# Altium PCB STM32四轴.PcbDoc (part 1 of 2)
Units mil, origin at the board's own origin, x right, y up, seen from the top; angles counter-clockwise.
Board outline 3937.01 x 3937.01 mil, 2 copper layers (Top Layer, Bottom Layer); 118 components, 144 nets, 597 pads, 182 vias.
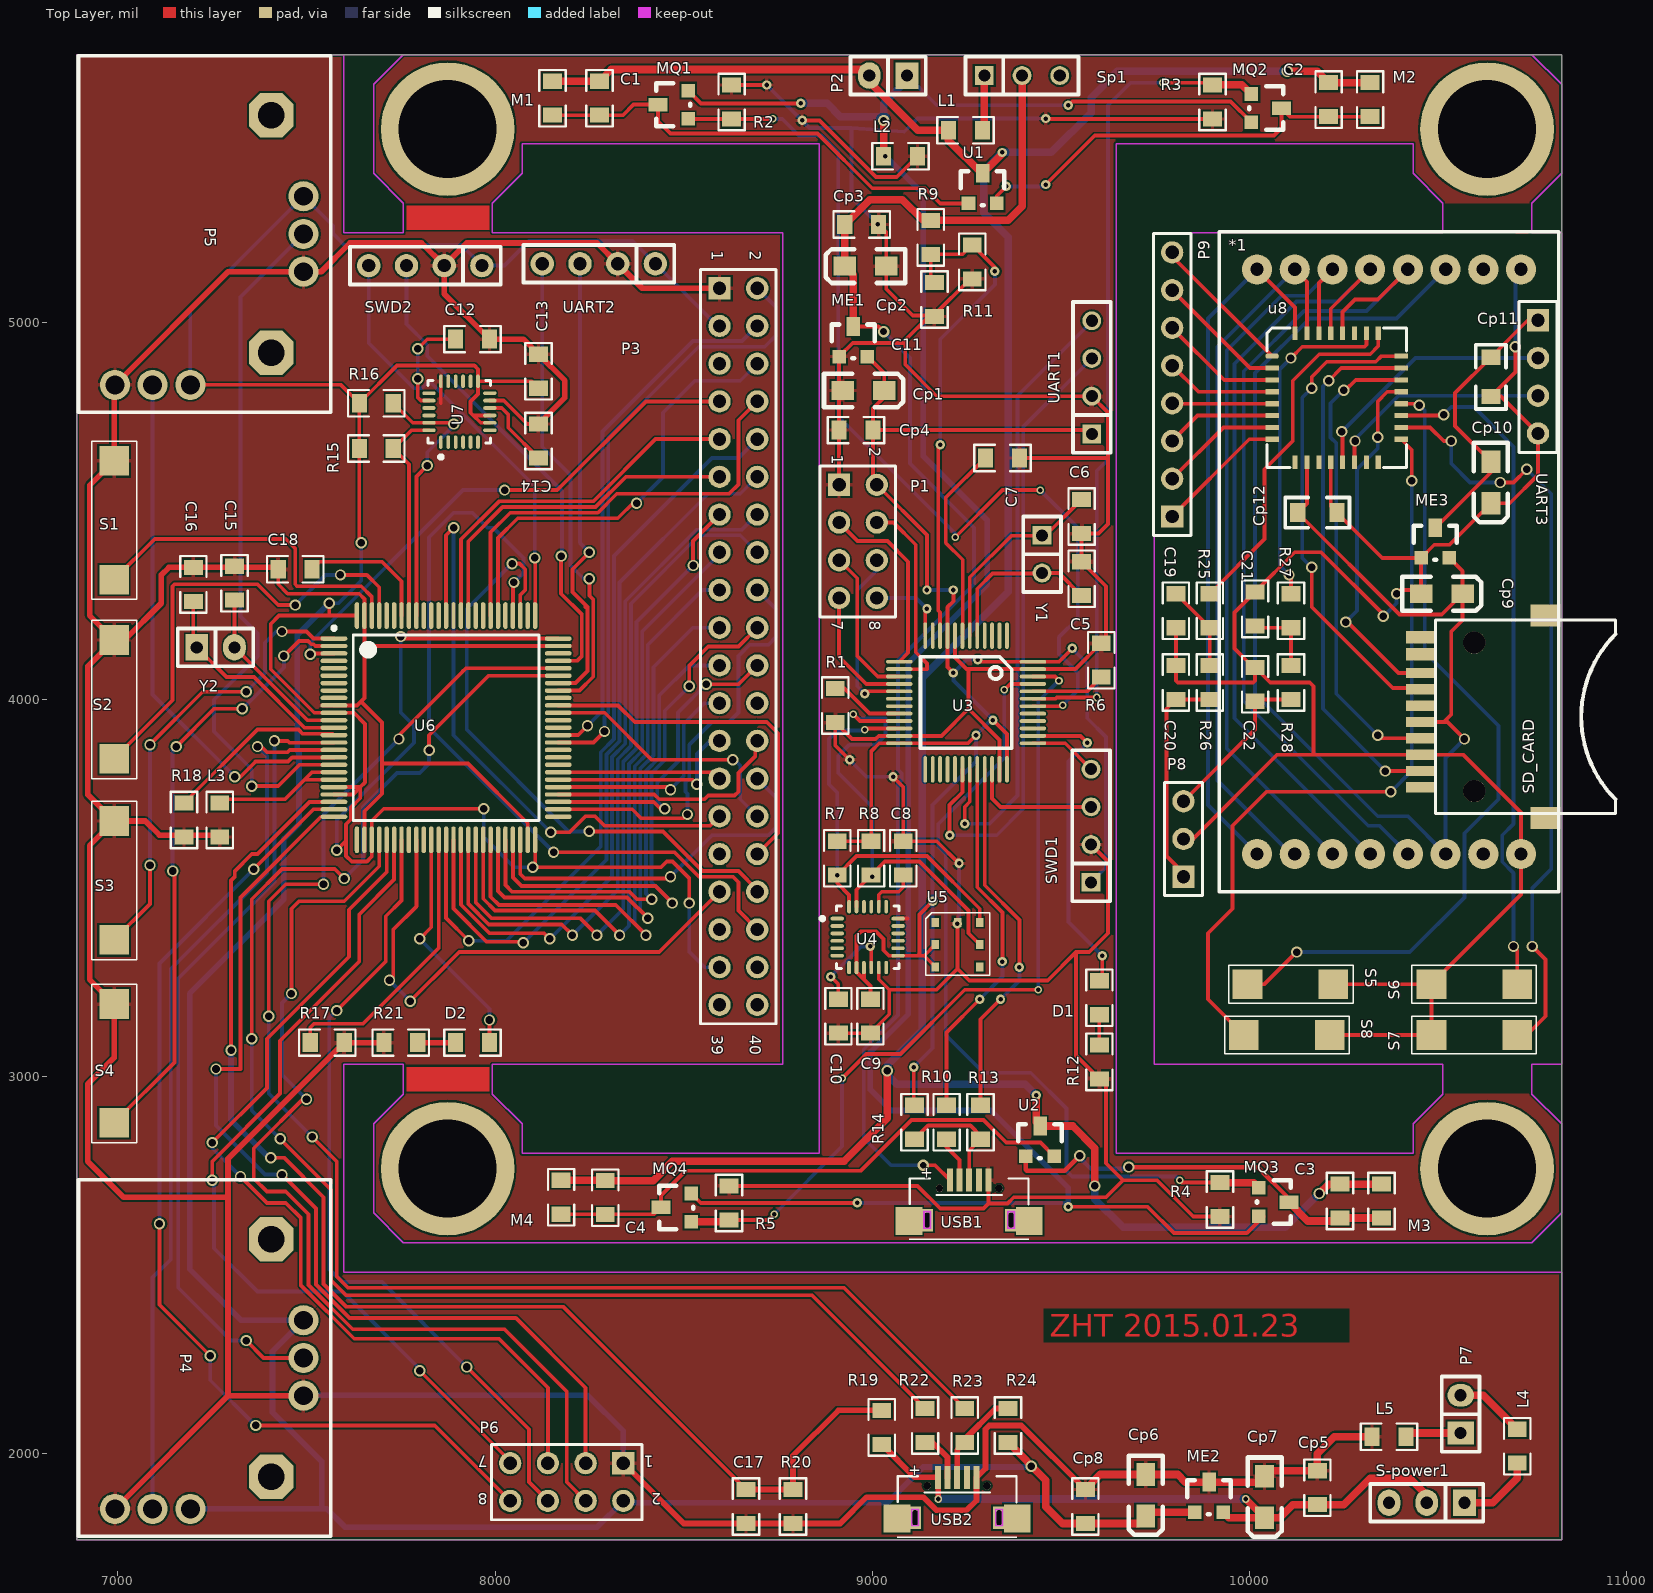
[diagram p0: Top Layer view]
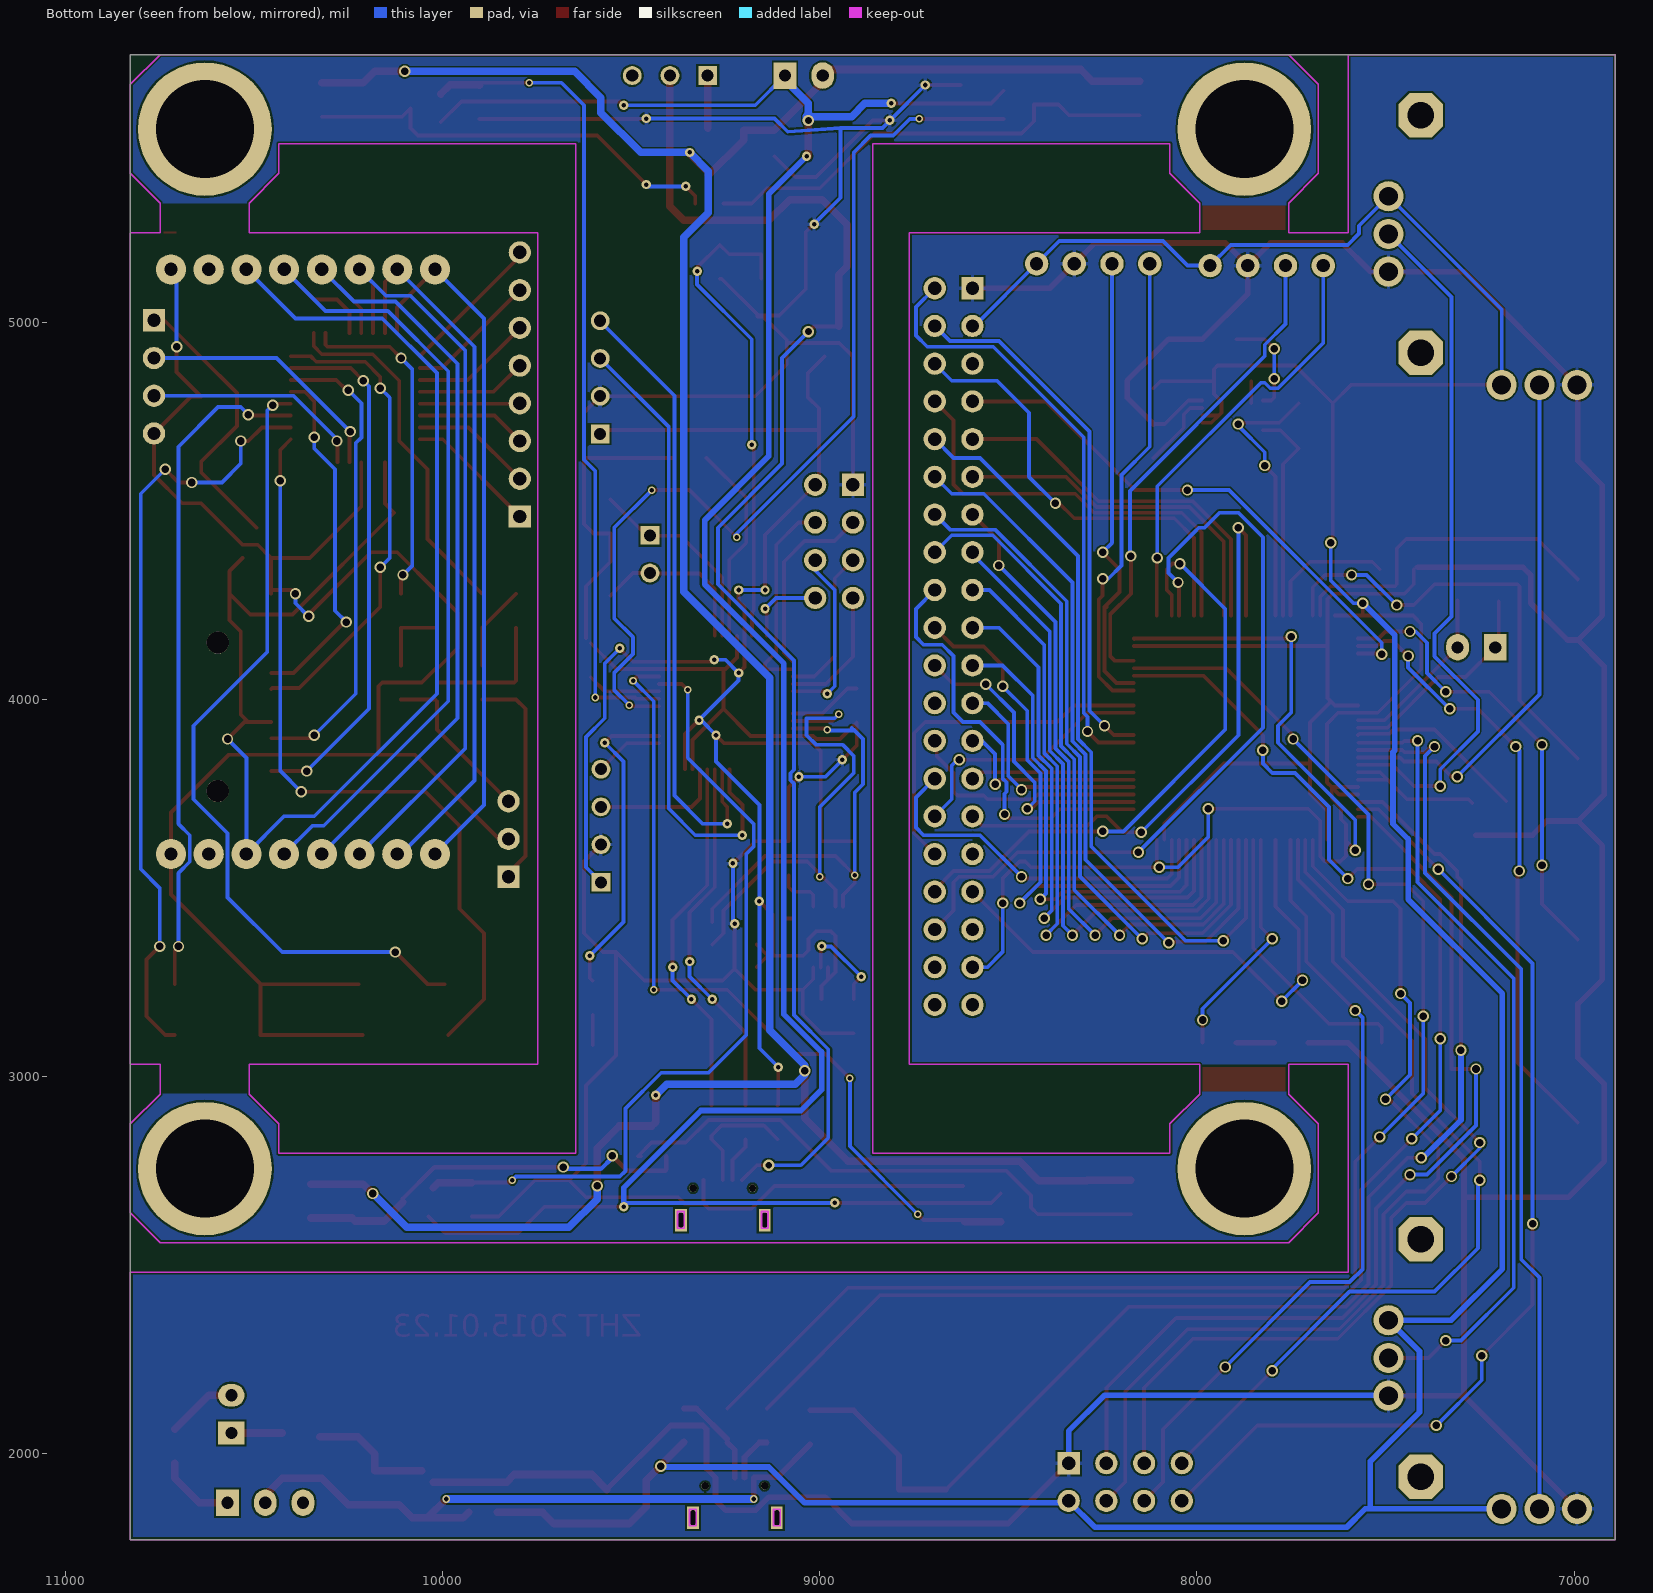
[diagram p1: Bottom Layer view, seen from below]

## Layer stack, top to bottom
Top Layer: signal copper 1.4
Dielectric: dielectric 12.6, FR-4, Dk 4.8
Bottom Layer: signal copper 1.4

## Board outline
6890.5,5709.42 6890.5,1772.41 10827.51,1772.41 10827.51,5709.42 6890.5,5709.42

## Design rules (kind name [scope] priority, off if disabled: settings)
Clearance [All] p1: gap=5
ComponentClearance [All] p1: gap=0 collisioncheckmode=3 verticalgap=0 showdistances=FALSE
DiffPairsRouting [All] p1: maxlimit=10 minlimit=5 mostfreqgap=10 maxuncoupledlength=500
HoleToHoleClearance [All] p1: gap=5 allowstackedmicrovias=TRUE
MinimumSolderMaskSliver [All] p1: minsoldermaskwidth=5
PolygonConnect [All] p1: connectstyle=Relief reliefconductorwidth=10 reliefentries=4 polygonreliefangle="90 Angle"
RoutingVias [All] p1: holewidth=12 width=25 viastyle="Through Hole" minholewidth=10 minwidth=20 maxholewidth=100 maxwidth=200
SilkToSilkClearance [All] p1: silktosilkclearance=5
SilkscreenOverComponentPads [All] p1: minsilkscreentomaskgap=5
SolderMaskExpansion [All] p1: expansion=4
Width [All] p1: maxlimit=50 minlimit=5 preferedwidth=5
22 further rules are at their usual default settings.

## Classes and differential pairs
component class STC51: *1 C19 C20 C21 C22 Cp9 Cp10 Cp11 Cp12 ME3 P8 P9 R25 R26 R27 R28 S5 S6 S7 S8 SD_CARD u8 UART3
component class STM32四轴: C1 C2 C3 C4 C5 C6 C7 C8 C9 C10 C11 Cp1 Cp2 Cp3 Cp4 D1 L1 L2 M1 M2 M3 M4 ME1 MQ1 MQ2 MQ3 MQ4 P1 P2 R1 R2 R3 R4 R5 R6 R7 R8 R9 R10 R11 R12 R13 R14 Sp1 SWD1 U1 U2 U3 U4 U5 UART1 USB1 Y1
component class STM32遥控: C12 C13 C14 C15 C16 C17 C18 Cp5 Cp6 Cp7 Cp8 D2 L3 L4 L5 ME2 P3 P4 P5 P6 P7 R15 R16 R17 R18 R19 R20 R21 R22 R23 R24 S1 S2 S3 S4 S-power1 SWD2 U6 U7 UART2 USB2 Y2

## Components (designator, comment, footprint, x,y, rotation, side; value= is the part's Value field where it differs from the comment)
*1 "5110" 5110 9920,5140 r0 top
C1 "Cap" 0805s 8277,5638.91 r270 top
C2 "Cap" 0805s 10210,5635 r270 top
C3 "Cap" 0805s 10240,2715 r270 top
C4 "Cap" 0805s 8292,2723.91 r270 top
C5 "Cap" 0805s 9555,4365 r270 top
C6 "Cap" 0805s 9555,4440 r90 top
C7 "Cap" 0805s 9390,4640 r180 top
C8 "Cap" 0805s 9082,3533.91 r90 top
C9 "Cap" 0805s 8995,3115 r90 top
C10 "Cap" 0805s 8910,3115 r90 top
C11 "Cap" 0805s 9165,5015 r90 top
C12 "Cap" 0805s 7895,4955 r0 top
C13 "Cap" 0805s 8115,4915 r270 top
C14 "Cap" 0805s 8115,4730 r270 top
C15 "Cap" 0805s 7308.91,4353 r270 top
C16 "Cap" 0805s 7200,4350 r270 top
C17 "Cap" 0805s 8665,1815 r90 top
C18 "Cap" 0805s 7425,4345 r0 top
C19 "Cap" 0805s 9805,4190 r90 top
C20 "Cap" 0805s 9805,4090 r270 top
C21 "Cap" 0805s 10015,4285 r270 top
C22 "Cap" 0805s 10015,4085 r270 top
Cp1 "Cap Pol1" 3216#1 9032,4818.91 r0 top
Cp2 "Cap Pol1" 3216#1 8927,5148.91 r180 top
Cp3 "Cap" 0805s 9017,5258.91 r180 top
Cp4 "Cap" 0805s 8912,4713.91 r0 top
Cp5 "Cap" 0805s 10180,1955 r270 top
Cp6 "Cap Pol1" 3216#2 9725,1945 r270 top
Cp7 "Cap Pol1" 3216#2 10040,1940 r270 top
Cp8 "Cap" 0805s 9565,1905 r270 top
Cp9 "Cap Pol1" 3216#2 10455,4280 r0 top
Cp10 "Cap Pol1" 3216#2 10640,4630 r270 top
Cp11 "Cap" 0805 10640,4810 r90 top
Cp12 "Cap" 0805 10225,4495 r180 top
D1 "LED0" 0805s 9602,3253.91 r270 top
D2 "LED0" 0805s 7985,3090 r180 top
L1 "Inductor" 0805s 9202,5508.91 r0 top
L2 "Inductor" 0805s 9030,5440 r0 top
L3 "Inductor" 0805s 7270,3635 r90 top
L4 "Inductor" 0805s 10710,2065 r270 top
L5 "Inductor" 0805s 10415,2045 r180 top
M1 "Header 2" 0805s 8152,5548.91 r90 top
M2 "Header 2" 0805s 10320,5635 r270 top
M3 "Header 2" 0805s 10350,2625 r90 top
M4 "Header 2" 0805s 8175,2725 r270 top
ME1 "Volt Reg" SOT-23#1 8912,4908.91 r0 top
ME2 "Volt Reg" SOT-23#2 9895,1925 r0 top
ME3 "Volt Reg" SOT-23#1 10455,4375 r0 top
MQ1 "NMOS-2" SOT-23#1 8512,5538.91 r90 top
MQ2 "NMOS-2" SOT-23#1 10005,5605 r270 top
MQ3 "NMOS-2" SOT-23#1 10025,2705 r270 top
MQ4 "NMOS-2" SOT-23#1 8520,2615 r90 top
P1 "NRF24L01" HDR2X4 8912,4568.91 r270 top
P2 "Header 2" SIP2#1 9042,5653.91 r180 top
P3 "Header 20X2" HDR2X20 8595,5090 r270 top
P4 "Header 5" yaogan 7092,2253.91 r270 top
P5 "Header 5" yaogan 7092,5233.91 r270 top
P6 "NRF24L01" HDR2X4 8340,1975 r180 top
P7 "Header 2" SIP2#1 10560,2105 r90 top
P8 "Header 3" HDR1X3 9825,3530 r90 top
P9 "Header 8" HDR1X8 9795,4485 r90 top
R1 "Res2" 0805s 8902,4028.91 r270 top
R2 "Res2" 0805s 8627,5538.91 r90 top
R3 "Res2" 0805s 9902,5628.91 r270 top
R4 "Res2" 0805s 9922,2718.91 r270 top
R5 "Res2" 0805s 8620,2620 r90 top
R6 "Res2" 0805s 9607,4058.91 r90 top
R7 "Res2" 0805s 8907,3533.91 r90 top
R8 "Res2" 0805s 8997,3533.91 r90 top
R9 "Res2" 0805s 9155,5180 r90 top
R10 "Res_0603" 0805s 9197,2833.91 r90 top
R11 "Res2" 0805s 9265,5115 r90 top
R12 "Res2" 0805s 9602,2993.91 r90 top
R13 "Res_0603" 0805s 9287,2833.91 r90 top
R14 "Res_0603" 0805s 9112,2833.91 r90 top
R15 "Res2" 0805s 7730,4665 r180 top
R16 "Res2" 0805s 7730,4785 r180 top
R17 "Res2" 0805s 7510,3090 r0 top
R18 "Res2" 0805s 7175,3725 r270 top
R19 "Res2" 0805s 9025,2115 r270 top
R20 "Res2" 0805s 8790,1815 r90 top
R21 "Res2" 0805s 7705,3090 r0 top
R22 "Res_0603" 0805s 9140,2030 r90 top
R23 "Res_0603" 0805s 9245,2030 r90 top
R24 "Res_0603" 0805s 9360,2120 r270 top
R25 "Res2" 0805s 9895,4190 r90 top
R26 "Res2" 0805s 9895,4000 r90 top
R27 "Res2" 0805s 10110,4190 r90 top
R28 "Res2" 0805s 10110,4000 r90 top
S1 "SW-PB" 按键#1 6990,4475 r90 top
S2 "SW-PB" 按键#1 6990,4000 r90 top
S3 "SW-PB" 按键#1 6990,3520 r90 top
S4 "SW-PB" 按键#1 6990,3035 r90 top
S5 "SW-PB" 按键#2 10065,3245 r0 top
S6 "SW-PB" 按键#2 10640,3245 r180 top
S7 "SW-PB" 按键#2 10640,3110 r180 top
S8 "SW-PB" 按键#2 10055,3110 r0 top
S-power1 "SW-SPST" SIP3#1 10470,1870 r180 top
SD_CARD "sd card" SD卡 10785,3960 r0 top
Sp1 "SW-SPST" SIP3#2 9297,5653.91 r0 top
SWD1 "HDR1X4_180_2.54" SIP4#1 9580,3515 r90 top
SWD2 "HDR1X4_180_2.54" SIP4#2 7965,5150 r180 top
U1 "bat54c" SOT-23#2 9295,5395 r0 top
U2 "bat54c" SOT-23#2 9447,2868.91 r0 top
U3 "STM32F103C8T6" LQFP48 9357,4168.91 r270 top
U4 "mpu6050" MPU6050 8907,3418.91 r0 top
U5 "bmp180" LCC8 9167,3408.91 r0 top
U6 "STM32F103VET6" LQFP100_N 7870,3925 r0 top
U7 "mpu6050" MPU6050 7856.09,4682 r90 top
u8 "STC15L2K60S2" LQFP-32 10060,4910 r0 top
UART1 "HDR1X4_180_2.54" SIP4#1 9582,4703.91 r90 top
UART2 "HDR1X4_180_2.54" SIP4#2 8425,5155 r180 top
UART3 "Header 4" HDR1X4 10765,5005 r270 top
USB1 "USB_Micro" MICRO-USB 9257,2638.91 r0 top
USB2 "USB_Micro" MICRO-USB 9225,1850 r0 top
Y1 "CRYSTAL" SIP2#2 9450,4435 r270 top
Y2 "CRYSTAL" SIP2#1 7258.91,4138 r0 top

## Footprints (in the part's own frame and the unit in brackets; to place one, negate y for a bottom-side part, rotate by r counter-clockwise, add the part's x,y. Pads: shape width x height; smd on the part's side, far side on the other; paste and mask are expansions set on the pad)
0805 [mil]
  rect 40x50 smd: 1(-7,0) 2(97,0)
  silkscreen extent -40,-40 130,40
0805s [mil]
  rect 40x50 smd: 1(0,0) 2(90,0)
  silkscreen extent -30,-35 120,35
3216#1 [mil]
  rect 60x50 smd: 1(0,0) 2(-110,0)
  silkscreen extent -160,-45 50,45
3216#2 [mil]
  rect 60x50 smd: 1(110,0) 2(0,0)
  silkscreen extent -50,-45 160,45
5110 [mil]
  round 80 hole 35.43: 1(100,-1550) 1(100,0) 2(200,-1550) 2(200,0) 3(300,-1550) 3(300,0) 4(400,-1550) 4(400,0) 5(500,-1550) 5(500,0) 6(600,-1550) 6(600,0) 7(700,-1550) 7(700,0) 8(800,-1550) 8(800,0)
  silkscreen extent 0,-1650 900,100
HDR1X3 [mm] "Connector; Header; 3 Position"
  rect 1.5x1.5 hole 0.9: 1(0,0)
  round 1.5 hole 0.9: 2(2.54,0) 3(5.08,0)
  silkscreen extent -1.27,-1.27 6.35,1.27
HDR1X4 [mm] "Connector; Header; 4 Position"
  rect 1.5x1.5 hole 0.9: 1(0,0)
  round 1.5 hole 0.9: 2(2.54,0) 3(5.08,0) 4(7.62,0)
  silkscreen extent -1.27,-1.27 8.89,1.27
HDR1X8 [mm] "Connector; Header; 8 Position"
  rect 1.5x1.5 hole 0.9: 1(0,0)
  round 1.5 hole 0.9: 2(2.54,0) 3(5.08,0) 4(7.62,0) 5(10.16,0) 6(12.7,0) 7(15.24,0) 8(17.78,0)
  silkscreen extent -1.27,-1.27 19.05,1.27
HDR2X4 [mm] "Connector; Header; 4x2 Position"
  rect 1.5x1.5 hole 0.9: 1(0,0)
  round 1.5 hole 0.9: 2(0,2.54) 3(2.54,0) 4(2.54,2.54) 5(5.08,0) 6(5.08,2.54) 7(7.62,0) 8(7.62,2.54)
  silkscreen extent -1.27,-1.27 8.89,3.81
HDR2X20 [mm] "Connector; Header; 20x2 Position"
  rect 1.5x1.5 hole 0.9: 1(0,0)
  round 1.5 hole 0.9: 2(0,2.54) 3(2.54,0) 4(2.54,2.54) 5(5.08,0) 6(5.08,2.54) 7(7.62,0) 8(7.62,2.54) 9(10.16,0) 10(10.16,2.54) 11(12.7,0) 12(12.7,2.54) 13(15.24,0) 14(15.24,2.54) 15(17.78,0) 16(17.78,2.54) 17(20.32,0) 18(20.32,2.54) 19(22.86,0) 20(22.86,2.54) 21(25.4,0) 22(25.4,2.54) 23(27.94,0) 24(27.94,2.54) 25(30.48,0) 26(30.48,2.54) 27(33.02,0) 28(33.02,2.54) 29(35.56,0) 30(35.56,2.54) 31(38.1,0) 32(38.1,2.54) 33(40.64,0) 34(40.64,2.54) 35(43.18,0) 36(43.18,2.54) 37(45.72,0) 38(45.72,2.54) 39(48.26,0) 40(48.26,2.54)
  silkscreen extent -1.27,-1.27 49.53,3.81
LCC8 [mm]
  rect 0.5x0.6 smd: 1(0,0) 2(0,-1.5) 3(0,-3) 4(3,-3) 5(3,-1.5) 6(3,0) 7(1.5,0)
  silkscreen extent -0.64,-3.56 3.68,0.64
LQFP48 [mil]
  oval 70x10 smd: 1(0,0) 2(0,-19.68) 3(0,-39.37) 4(0,-59.06) 5(0,-78.74) 6(0,-98.42) 7(0,-118.11) 8(0,-137.8) 9(0,-157.48) 10(0,-177.17) 11(0,-196.85) 12(0,-216.53) 25(354.33,-216.53) 26(354.33,-196.85) 27(354.33,-177.17) 28(354.33,-157.48) 29(354.33,-137.8) 30(354.33,-118.11) 31(354.33,-98.42) 32(354.33,-78.74) 33(354.33,-59.06) 34(354.33,-39.37) 35(354.33,-19.68) 36(354.33,0)
  oval 10x70 smd: 13(68.9,-285.43) 14(88.58,-285.43) 15(108.27,-285.43) 16(127.95,-285.43) 17(147.64,-285.43) 18(167.32,-285.43) 19(187.01,-285.43) 20(206.69,-285.43) 21(226.38,-285.43) 22(246.06,-285.43) 23(265.75,-285.43) 24(285.43,-285.43) 37(285.43,68.9) 38(265.75,68.9) 39(246.06,68.9) 40(226.38,68.9) 41(206.69,68.9) 42(187.01,68.9) 43(167.32,68.9) 44(147.64,68.9) 45(127.95,68.9) 46(108.27,68.9) 47(88.58,68.9) 48(68.9,68.9)
  silkscreen extent 56,-229 298,13
LQFP100_N [mm] "Thin QFP, 100-Leads, Body 14x14mm, Pitch 0.5mm, IPC Medium Density"
  oval 1.8x0.3 smd: 1(-7.55,6) 2(-7.55,5.5) 3(-7.55,5) 4(-7.55,4.5) 5(-7.55,4) 6(-7.55,3.5) 7(-7.55,3) 8(-7.55,2.5) 9(-7.55,2) 10(-7.55,1.5) 11(-7.55,1) 12(-7.55,0.5) 13(-7.55,0) 14(-7.55,-0.5) 15(-7.55,-1) 16(-7.55,-1.5) 17(-7.55,-2) 18(-7.55,-2.5) 19(-7.55,-3) 20(-7.55,-3.5) 21(-7.55,-4) 22(-7.55,-4.5) 23(-7.55,-5) 24(-7.55,-5.5) 25(-7.55,-6) 51(7.55,-6) 52(7.55,-5.5) 53(7.55,-5) 54(7.55,-4.5) 55(7.55,-4) 56(7.55,-3.5) 57(7.55,-3) 58(7.55,-2.5) 59(7.55,-2) 60(7.55,-1.5) 61(7.55,-1) 62(7.55,-0.5) 63(7.55,0) 64(7.55,0.5) 65(7.55,1) 66(7.55,1.5) 67(7.55,2) 68(7.55,2.5) 69(7.55,3) 70(7.55,3.5) 71(7.55,4) 72(7.55,4.5) 73(7.55,5) 74(7.55,5.5) 75(7.55,6)
  oval 0.3x1.8 smd: 26(-6,-7.55) 27(-5.5,-7.55) 28(-5,-7.55) 29(-4.5,-7.55) 30(-4,-7.55) 31(-3.5,-7.55) 32(-3,-7.55) 33(-2.5,-7.55) 34(-2,-7.55) 35(-1.5,-7.55) 36(-1,-7.55) 37(-0.5,-7.55) 38(0,-7.55) 39(0.5,-7.55) 40(1,-7.55) 41(1.5,-7.55) 42(2,-7.55) 43(2.5,-7.55) 44(3,-7.55) 45(3.5,-7.55) 46(4,-7.55) 47(4.5,-7.55) 48(5,-7.55) 49(5.5,-7.55) 50(6,-7.55) 76(6,7.55) 77(5.5,7.55) 78(5,7.55) 79(4.5,7.55) 80(4,7.55) 81(3.5,7.55) 82(3,7.55) 83(2.5,7.55) 84(2,7.55) 85(1.5,7.55) 86(1,7.55) 87(0.5,7.55) 88(0,7.55) 89(-0.5,7.55) 90(-1,7.55) 91(-1.5,7.55) 92(-2,7.55) 93(-2.5,7.55) 94(-3,7.55) 95(-3.5,7.55) 96(-4,7.55) 97(-4.5,7.55) 98(-5,7.55) 99(-5.5,7.55) 100(-6,7.55)
  silkscreen extent -7.67,-6.25 6.25,6.82, body extent -7,-7 7,7, height 1.6
LQFP-32 [mm]
  oval 0.9x0.35 smd: 1(0,0)
  rect 0.9x0.35 smd: 2(0,-0.8) 3(0,-1.6) 4(0,-2.4) 5(0,-3.2) 6(0,-4) 7(0,-4.8) 8(0,-5.6) 17(8.7,-5.6) 18(8.7,-4.8) 19(8.7,-4) 20(8.7,-3.2) 21(8.7,-2.4) 22(8.7,-1.6) 23(8.7,-0.8) 24(8.7,0)
  rect 0.35x0.9 smd: 9(1.55,-7.15) 10(2.35,-7.15) 11(3.15,-7.15) 12(3.95,-7.15) 13(4.75,-7.15) 14(5.55,-7.15) 15(6.35,-7.15) 16(7.15,-7.15) 25(7.15,1.55) 26(6.35,1.55) 27(5.55,1.55) 28(4.75,1.55) 29(3.95,1.55) 30(3.15,1.55) 31(2.35,1.55) 32(1.55,1.55)
  silkscreen extent -0.35,-7.5 9.05,1.9
MICRO-USB [mm]
  rect 0.4x1.55 smd: 1(-1.3,2.2) 2(-0.65,2.2) 3(0,2.2) 4(0.65,2.2) 5(1.3,2.2)
  rect 1.8x1.9 smd: 6(-4.05,-0.55) 6(4.05,-0.55)
  rect 0.8x1.5 hole 0.4 slot 1 at 90 deg: 6(-2.825,-0.5) 6(2.825,-0.5)
  round 0.5 hole 0.5 unplated: ""(-2,1.65) ""(2,1.65)
  Keep-Out Layer lines w0.127: -3.054,-1.043 -3.054,0.075 -2.596,0.075 -2.596,-1.043 -3.054,-1.043 ; 2.596,-1.043 2.596,0.075 3.054,0.075 3.054,-1.043 2.596,-1.043
  silkscreen extent -4.05,-1.8 4,2.3
MPU6050 [mm]
  oval 0.9x0.25 smd: 1(0,0) 2(0,-0.5) 3(0,-1) 4(0,-1.5) 5(0,-2) 6(0,-2.5) 13(4.1,-2.5) 14(4.1,-2) 15(4.1,-1.5) 16(4.1,-1) 17(4.1,-0.5) 18(4.1,0)
  oval 0.25x0.9 smd: 7(0.8,-3.3) 8(1.3,-3.3) 9(1.8,-3.3) 10(2.3,-3.3) 11(2.8,-3.3) 12(3.3,-3.3) 19(3.3,0.8) 20(2.8,0.8) 21(2.3,0.8) 22(1.8,0.8) 23(1.3,0.8) 24(0.8,0.8)
  silkscreen extent -1.12,-3.35 4.15,0.85
SD卡 [mm]
  rect 2x0.7 smd: 1(-8.398,2.795) 2(-8.398,1.695) 3(-8.398,0.595) 4(-8.398,-0.505) 5(-8.398,-1.605) 6(-8.398,-2.705) 7(-8.398,-3.805) 8(-8.398,-4.905)
  rect 2x1.5 smd: 11(0.002,6.665) 12(0.002,-6.975)
  rect 2x0.85 smd: CD1(-8.398,5.195) CD2(-8.398,4.045)
  round 1.5 hole 1.5 unplated: ""(-4.798,-5.155)
  round 1.5 hole 1.5: ""(-4.798,4.845)
  silkscreen extent -7.4,-6.67 4.7,6.36
SIP2#1 [mil]
  rect 60x70 hole 32: 1(-50,0)
  oval 60x70 hole 32: 2(50,0)
  silkscreen extent -100,-50 100,50
SIP2#2 [mil]
  rect 50x50 hole 32: 1(0,0)
  round 50 hole 32: 2(100,0)
  silkscreen extent -50,-50 150,50
SIP3#1 [mil]
  rect 60x70 hole 32: 1(-100,0)
  oval 60x70 hole 32: 2(0,0) 3(100,0)
  silkscreen extent -150,-50 150,50
SIP3#2 [mil]
  rect 50x50 hole 32: 1(0,0)
  round 50 hole 32: 2(100,0) 3(200,0)
  silkscreen extent -50,-50 250,50
SIP4#1 [mil]
  rect 50x50 hole 32: 1(0,0)
  round 50 hole 32: 2(100,0) 3(200,0) 4(300,0)
  silkscreen extent -50,-50 350,50
SIP4#2 [mil]
  round 62 hole 35: 1(0,0) 2(100,0) 3(200,0) 4(300,0)
  silkscreen extent -50,-50 350,50
SOT-23#1 [mil]
  rect 36x36 smd: 1(0,0) 2(75,0)
  rect 36x50 smd: 3(38,80)
  silkscreen extent -20,-5 95,85
SOT-23#2 [mil]
  rect 36x50 smd: 1(-2,0)
  rect 36x36 smd: 2(-40,-80) 3(35,-80)
  silkscreen extent -60,-85 55,5
yaogan [mil]
  round 80 hole 50: 1(-100,400) 1(400,100) 2(100,400) 2(400,-100) 3(0,400) 4(400,0)
  oct 118.11x118.11 hole 70: ""(-314.96,314.96) ""(314.96,314.96)
  silkscreen extent -472,-197 472,472
按键#1 [mm]
  rect 2x2 smd: 1(-4,0) 2(4,0)
  silkscreen extent -5.33,-1.52 5.33,1.52
按键#2 [mm]
  rect 2x2 smd: 1(-1.778,0) 2(4,0)
  silkscreen extent -3.05,-1.27 5.33,1.27

## Part data
C1 C2 C3 C4 C5 C6 C7 C8 C9 C10 C11 C12 C13 C14 C15 C16 C17 C18 C19 C20 C21 C22 Cp3 Cp4 Cp5 Cp8 Cp11 Cp12: "Capacitor"
Cp1 Cp2 Cp6 Cp7 Cp9 Cp10: "Polarized Capacitor (Radial)"
D1 D2: "Typical INFRARED GaAs LED"
M1 M2 M3 M4 P2 P7: "Header, 2-Pin"
ME1 ME2 ME3: "Voltage Regulator"
MQ1 MQ2 MQ3 MQ4: "N-Channel Power MOSFET"
P1 P6: library part MHDR2X4, "Header, 4-Pin, Dual row"
P3: "Header, 20-Pin, Dual row"
P4 P5: "Header, 5-Pin"
P8: "Header, 3-Pin"
P9: "Header, 8-Pin"
R1 R2 R3 R4 R5 R6 R7 R8 R9 R10 R11 R12 R13 R14 R15 R16 R17 R18 R19 R20 R21 R22 R23 R24 R25 R26 R27 R28: "Resistor"
S1 S2 S3 S4 S5 S6 S7 S8: "Switch"
S-power1 Sp1: "Single-Pole, Single-Throw Switch"
SWD1 SWD2 UART1 UART2: "Header"
U3: "STM32 ARM-based 32-bit MCU with 64 Kbytes Flash, 48-pin LQFP, Industrial Temperature"
UART3: "Header, 4-Pin"
USB1 USB2: "USB"
Y1 Y2: "Crystal"

## Free pads (board coordinates)
  round 354.33 hole 259.84: 1(7874.02,5511.81) 2(10629.92,5511.81) 3(10629.92,2755.91) 4(7874.02,2755.91)

## Via types
v1: diameter 30, hole 20, Top Layer to Bottom Layer, 121 vias
v2: diameter 25, hole 12, Top Layer to Bottom Layer, 40 vias
v3: diameter 20, hole 12, Top Layer to Bottom Layer, 18 vias
v4: diameter 30, hole 18, Top Layer to Bottom Layer, 3 vias

## Nets (pads, with @x,y where several pads share a name; then routed paths per layer and width w, separated by ;. In a path a pad name is that pad's centre, name@x,y a point inside that pad or via, vN(x,y) a via of type N, cw(c..) or ccw(c..) an arc to the next point about the centre after c; other vN are vias at no path point)
5110-CE: *1.2 u8.31 | length 1898.1
  Top Layer w10: *1.2@10120,5140 10152.52,5107.48 u8.31@10152.52,4971.02
  Bottom Layer w10: *1.2@10110,3590 9915,3785 9915,4935 *1.2@10120,5140
5110-CLK: *1.5 u8.28 | length 2300.4
  Top Layer w10: u8.28@10247.01,4971.02 10247.01,5027.01 10280,5060 10340,5060 *1.5@10420,5140
  Bottom Layer w10: *1.5@10420,3590 10345,3665 10315,3665 9985,3995 9985,4870 10145,5030 10310,5030 *1.5@10420,5140
5110-DC: *1.3 u8.30 | length 2003.9
  Top Layer w10: u8.30@10184.02,4971.02 10184.02,5104.02 *1.3@10220,5140
  Bottom Layer w10: *1.3@10220,3590 9940,3870 9940,4925 10085,5070 10150,5070 *1.3@10220,5140
5110-DIN: *1.4 u8.29 | length 2124.9
  Top Layer w10: u8.29@10215.51,4971.02 10215.51,5035.51 *1.4@10320,5140
  Bottom Layer w10: *1.4@10320,3590 9960,3950 9960,4890 10125,5055 10235,5055 *1.4@10320,5140
5110-RST: *1.1 u8.32 | length 1897.8
  Top Layer w10: *1.1@10020,5140 10121.02,5038.98 u8.32@10121.02,4971.02
  Bottom Layer w10: *1.1@10020,3590 9890,3720 9890,5010 *1.1@10020,5140 *1.1@10049.29,5140
AD1Y: P4.3 U6.15 | length 2123.9
  Top Layer w10: v1(7340,2300) 7386.09,2253.91 P4.3@7492,2253.91 ; v1(7415,3890) 7450,3890 7455,3885 U6.15@7572.13,3885
  Bottom Layer w10: v1(7340,2300) 7300,2300 7160,2440 7160,3260 7415,3515 v1(7415,3890)
AD2Y: P4.4 U6.16 | length 2377.1
  Top Layer w10: v1(7370,3875) 7380,3875 7395,3860 7450,3860 7455.94,3865.94 7500,3865.94 ; 7491.3,3865.94 7500,3865.94 ; U6.16@7572.76,3865.94 7500,3865.94
  Bottom Layer w10: P4.4@7092,1853.91 7092,2467 7140,2515 7140,3285 7395,3540 7395,3850 v1(7370,3875)
AD7Y: P5.4 U6.17 | length 1413.2
  Top Layer w10: v1(7310,3795) 7325,3795 7362.24,3832.24 7365,3835 7450.64,3835 7461.9,3846.26 U6.17@7572.76,3846.26
  Bottom Layer w10: P5.4@7092,4833.91 7092,4013 v1(7310,3795)
AD8Y: P5.3 U6.18 | length 1882
  Top Layer w10: v1(7355,3770) 7425,3770 7481.57,3826.57 U6.18@7572.76,3826.57
  Bottom Layer w10: v1(7355,3770) 7355,3815 7255,3915 7255,3999.09 7370,4114.09 7370,4175 7325,4220 7325,5066.91 P5.3@7492,5233.91
ADC: C11.2 R9.1 R11.2 U3.10 | length 1310.4
  Top Layer w10: C11.2@9155,5115 R9.1@9155,5180 9240,5180 R11.2@9265,5205 9325,5145 v2(9325,5135) ; U3.10@9179.83,4168.91 9179.83,4230.16 9175.15,4234.85 9175.15,4260 9175,4260.15 9175,4670 v2(9180,4675)
  Bottom Layer w10: v2(9180,4675) 9180,4955 9325,5100 v2(9325,5135)
ADCY: C17.2 R19.1 R20.2 U6.23 | length 3408.1
  Top Layer w10: v1(7300,3070) 7300,3520 7310,3530 7310,3545 7355,3590 7370,3590 7508.15,3728.15 U6.23@7572.76,3728.15 ; v1(7405,2785) 7440,2785 7545,2680 7545,2450 7605,2390 8180,2390 C17.2@8665,1905
  Top Layer w15: C17.2@8665,1905 R20.2@8790,1905 8790,1995 8910,2115 R19.1@9025,2115
  Bottom Layer w15: v1(7300,3070) 7300,2885 7400,2785 v1(7405,2785)
CE: P1.3 U3.13 | length 500.7
  Top Layer w10: P1.3@8912,4468.91 8960.91,4420 9040,4420 9095,4365 9095,4270 9095,4123.44 U3.13@9071.57,4100.01
CEY: P6.3 U6.25 | length 2592.1
  Top Layer w10: v1(7260,3020) 7325,3020 7325,3475 7538.78,3688.78 U6.25@7572.76,3688.78 ; v1(7435,2740) 7525,2650 7525,2448.79 7613.79,2360 8055,2360 8240,2175 P6.3@8240,1975
  Bottom Layer w10: v1(7260,3020) 7260,2870 7390,2740 v1(7435,2740)
CSN: P1.4 U3.14 | length 543.4
  Top Layer w10: P1.4@9012,4468.91 9056.09,4468.91 9115,4410 9115,4125 9145,4095 9145,4080 9071.89,4080 U3.14@9071.57,4080.32
CSNY: P6.4 U6.29 | length 2664.3
  Top Layer w10: v1(7460,3220) 7460,3445 7480,3465 7600,3465 7692.83,3557.83 U6.29@7692.83,3627.76 ; v1(7500,2940) 7500,2950 7360,2810 7360,2730 7395,2695 7445,2695 7505,2635 7505,2447.57 7622.57,2330 8025,2330 8190,2165 8190,1925 P6.4@8240,1875
  Bottom Layer w10: v1(7460,3220) 7435,3195 7435,3005 v1(7500,2940)
DM: R10.2 U3.32 | length 979.6
  Top Layer w10: R10.2@9197,2923.91 9197,3117 v2(9285,3205) ; U3.32@9278.26,3814.58 9278.26,3501.74 9345,3435 v2(9345,3305)
  Bottom Layer w10: v2(9285,3205) 9345,3265 v2(9345,3305)
DMY: R22.2 U6.70 | length 4027.3
  Top Layer w10: v1(7355,3100) 7355,3470 7435,3550 7575,3550 v1(7600,3525) v1@7600,3530 ; v1(7430,2835) 7565,2700 7565,2460 7605,2420 8840,2420 R22.2@9140,2120 ; v1(7825,3865) 7825,3905 7982.8,4062.8 U6.70@8167.24,4062.8
  Bottom Layer w10: v1(7355,3100) 7355,2910 v1(7430,2835) ; v1@7600,3530 v1(7600,3525) 7650,3575 7650,3715 7740,3805 7800,3805 7825,3830 v1(7825,3865)
DP: R13.2 U3.33 | length 971.5
  Top Layer w10: R13.2@9287,2923.91 9287,3152 v2(9340,3205) ; U3.33@9297.94,3814.58 9297.94,3507.05 9390,3415 v2(9390,3290)
  Bottom Layer w10: v2(9340,3205) 9390,3255 v2(9390,3290)
DPY: R23.2 U6.71 | length 4033.8
  Top Layer w10: v1(7400,3160) 7400,3465 7445,3510 v1(7545,3510) ; v1(7515,2840) 7580,2775 7580,2470 7610,2440 8925,2440 R23.2@9245,2120 ; v1(7745,3895) 7745,3905 7910,4070 ; 7915,4075 7910,4070 ; U6.71@8167.24,4082.48 7922.48,4082.48 7910,4070
  Bottom Layer w10: v1(7400,3160) 7400,2955 v1(7515,2840) ; v1(7545,3510) 7545,3695 v1(7745,3895) v1@7745,3905
F_CS: P3.31
FSMC_D0: P3.2 U6.61 | length 1621.6
  Top Layer w10: U6.61@8167.24,3885.63 8260.63,3885.63 v1(8290,3915)
  Bottom Layer w10: v1(8290,3915) 8290,3953.79 8300,3963.79 8300,4695 8540,4935 8715,4935 8745,4965 8745,5040 P3.2@8695,5090
FSMC_D1: P3.4 U6.62 | length 1410.5
  Top Layer w10: U6.62@8167.24,3905.32 8220.32,3905.32 v1(8245,3930)
  Bottom Layer w10: v1(8245,3930) 8285,3970 8285,4710 8525,4950 8655,4950 P3.4@8695,4990
FSMC_D2: P3.6 U6.81 | length 1187.9
  Top Layer w10: U6.81@8007.8,4222.24 8007.8,4427.8 8060,4480 8290,4480 8325,4480 8370,4525 v1(8375,4520)
  Bottom Layer w10: v1(8375,4520) 8445,4590 8445,4760 8530,4845 8650,4845 P3.6@8695,4890
FSMC_D3: P3.8 U6.82 | length 1171
  Top Layer w10: U6.82@7988.11,4222.24 7988.11,4443.11 8040,4495 8272.43,4495 8322.43,4545 8620,4545 8645,4570 8645,4740 P3.8@8695,4790
FSMC_D4: P3.10 U6.38 | length 2039.1
  Top Layer w10: U6.38@7870,3627.76 7870,3420 v1(7930,3360)
  Bottom Layer w10: v1(7930,3360) 8030,3360 8280,3610 8280,3860 8315,3895 8315,4380 8575,4640 8645,4640 P3.10@8695,4690
FSMC_D5: P3.12 U6.39 | length 1946.8
  Top Layer w10: U6.39@7889.69,3627.76 7889.69,3445.32 7977.5,3357.5 8072.5,3357.5 v1(8075,3355)
  Bottom Layer w10: v1(8075,3355) 8295,3575 8295,3853.79 8330,3888.79 8330,4310 8565,4545 8650,4545 P3.12@8695,4590
FSMC_D6: P3.14 U6.40 | length 1868.4
  Top Layer w10: U6.40@7909.37,3627.76 7909.37,3455.63 7985,3380 8130,3380 v1(8145,3365)
  Bottom Layer w10: v1(8145,3365) 8310,3530 8310,3847.57 8345,3882.57 8345,4260 8535,4450 8655,4450 P3.14@8695,4490
FSMC_D7: P3.16 U6.41 | length 1852.3
  Top Layer w10: U6.41@7929.06,3627.76 7929.06,3457.16 7983.11,3403.11 8176.89,3403.11 v1(8205,3375)
  Bottom Layer w10: v1(8205,3375) 8325,3495 8325,3841.36 8360,3876.36 8360,4253.79 8541.21,4435 8650,4435 P3.16@8695,4390
FSMC_D8: P3.13 U6.42 | length 1773.1
  Top Layer w10: U6.42@7948.74,3627.76 7948.74,3461.26 7990,3420 8225,3420 v1(8270,3375) ; v1(8525,4355) 8525,4420 P3.13@8595,4490
  Bottom Layer w10: v1(8270,3375) 8340,3445 8340,3835.15 8375,3870.15 8375,4205 v1(8525,4355)
FSMC_D9: P3.15 U6.43 | length 1682.5
  Top Layer w10: U6.43@7968.43,3627.76 7968.43,3471.57 8000,3440 8265,3440 v1(8330,3375)
  Bottom Layer w10: v1(8330,3375) 8355,3400 8355,3828.93 8390,3863.93 8390,4180 8595,4385 P3.15@8595,4390
FSMC_D10: P3.17 U6.44 | length 1651.9
  Top Layer w10: U6.44@7988.11,3627.76 7988.11,3476.89 8010,3455 8320,3455 v1(8400,3375)
  Bottom Layer w10: v1(8400,3375) 8370,3405 8370,3822.72 8405,3857.72 8405,4145 8550,4290 P3.17@8595,4290
FSMC_D11: P3.19 U6.45 | length 1468.9
  Top Layer w10: U6.45@8007.8,3627.76 8007.8,3492.2 8025,3475 8350,3475 v1(8405,3420)
  Bottom Layer w10: v1(8405,3420) 8385,3440 8385,3816.51 8420,3851.51 8420,4085 8525,4190 P3.19@8595,4190
FSMC_D12: P3.21 U6.46 | length 1298.4
  Top Layer w10: U6.46@8027.48,3627.76 8027.48,3507.52 8045,3490 8356.21,3490 8376.21,3470 v1(8415,3470)
  Bottom Layer w10: v1(8415,3470) 8400,3485 8400,3810.29 8435,3845.29 8435,4010 8515,4090 P3.21@8595,4090 P3.21@8580,4075
FSMC_D13: P3.23 U6.55 | length 608.1
  Top Layer w10: U6.55@8167.24,3767.52 8457.48,3767.52 v1(8465,3760)
  Bottom Layer w10: v1(8465,3760) 8465,3761.57 8500,3796.57 8500,3935 8555,3990 P3.23@8595,3990
FSMC_D14: P3.25 U6.56 | length 527.3
  Top Layer w10: U6.56@8167.24,3787.2 8522.8,3787.2 v1(8535,3775)
  Bottom Layer w10: v1(8535,3775) 8535,3855 8570,3890 P3.25@8595,3890
FSMC_D15: P3.27 U6.57 | length 434.8
  Top Layer w10: U6.57@8167.24,3806.89 8578.11,3806.89 P3.27@8595,3790
GND: C5.1 C6.1 C7.1 C8.2 C9.1 C10.1 C11.1 Cp1.2 Cp2.2 Cp3.1 Cp4.1 L2.2 ME1.1 P1.1 R1.2 R2.2 R3.2 R4.2 R5.2 R6.2 R11.1 R12.1 SWD1.2 U3.8 U3.23 U3.35 U3.47 U4.11 U4.18 U5.7 UART1.2 USB1.5 | length 10132.2
  Top Layer w10: R5.2@8620,2710 9120,2710 9180,2650 9295,2650 9308.18,2663.18 ; R2.2@8627,5628.91 v2(8720,5628.91) v2@8723.91,5628.91 ; v2(8813.91,5535) 8860,5535 9010,5385 9065,5385 L2.2@9120,5440 ; C10.1@8910,3115 C9.1@8995,3115 9045,3165 9045,3230 ; P1.1@8912,4568.91 Cp4.1@8912,4713.91 ME1.1@8912,4908.91 8948.09,4945 9087.5,4945 ; v2(8940,3840) 8902,3878 R1.2@8902,3938.91 8945.91,3895 9008.79,3895 9016.94,3903.16 U3.23@9071.57,3903.16 9183.16,3903.16 9255,3975 ; Cp3.1@9017,5258.91 9037,5238.91 Cp2.2@9037,5148.91 9037,5088 9107.5,5017.5 9162.5,5017.5 9260,5115 R11.1@9265,5115 ; U4.11@9017.24,3288.98 9017.24,3257.76 9045,3230 ; v2(9055,3795) 9082,3768 C8.2@9082,3623.91 9171.09,3623.91 v2(9230,3565) ; U4.18@9068.42,3418.91 9093.91,3418.91 ; C11.1@9165,5015 9150,5015 9087.5,4952.5 9087.5,4945 ; U3.8@9219.2,4168.91 9219.2,4110.8 9249.68,4080.32 9255,4080.32 ; U5.7@9226.06,3408.91 9226.06,3286.06 ; USB1.5@9308.18,2725.52 9308.18,2663.18 ; U3.35@9337.32,3814.58 9337.32,3892.68 9255,3975 ; C7.1@9390,4640 9625,4640 ; v2(9460,5540) 9461.09,5538.91 R3.2@9902,5538.91 ; SWD1.2@9580,3615 9625,3570 9625,3380 9575,3330 9540,3330 ; R6.2@9607,4148.91 9538.42,4080.32 U3.47@9425.9,4080.32 9255,4080.32 ; R6.2@9620,4161.91 9620,4300 C5.1@9555,4365 C6.1@9555,4440 9600,4440 9625,4465 9625,4640 ; R4.2@9922,2628.91 9851.09,2628.91 9755,2725 9665,2725 ; 9045,3230 9170,3230 9226.06,3286.06 ; 9087.5,4945 9087.5,4887.5 9171.09,4803.91 UART1.2@9582,4803.91 9625,4760.91 9625,4640 ; 9226.06,3286.06 9257.11,3255 9465,3255 9540,3330 ; 9255,3975 9255,4080.32 ; 9308.18,2663.18 9358.18,2663.18 9375,2680 9620,2680 9665,2725 ; 9540,3330 9540,3055.91 9620,2975.91 9620,2770 9665,2725
  Bottom Layer w10: v2(8720,5628.91) v2(8813.91,5535) 8833.91,5515 8945,5515 ; v2(8940,3840) 8985,3795 v2(9055,3795) ; v2(9015,5260) 8945,5330 8945,5515 ; v2(9225,3405) 9230,3410 v2(9230,3565) ; v2(9460,5540) 9120,5540 9085,5505 8945,5515
GND-51: *1.8 C19.1 C20.1 C21.1 C22.1 Cp9.2 Cp10.1 Cp11.1 Cp12.1 ME3.1 P8.2 S5.2 S6.2 S7.2 S8.2 SD_CARD.6 u8.12 UART3.4 | length 5419.8
  Top Layer w10: C19.1@9805,4190 C20.1@9805,4090 9805,4050 9810,4045 10010,4045 10015,4050 C22.1@10015,4085 ; P8.2@9825,3630 9850,3630 10073.5,3853.5 10170,3853.5 ; S8.2@10212.48,3110 S7.2@10482.52,3110 S6.2@10482.52,3245 ; u8.12@10215.51,4628.5 10215.51,4511.49 Cp12.1@10232,4495 10352,4375 ME3.1@10455,4375 ; S5.2@10222.48,3245 S6.2@10482.52,3245 ; v1(10355,4220) 10355,4225 10190,4390 10120,4390 C21.1@10015,4285 9960,4230 9960,4135 10010,4085 C22.1@10015,4085 ; v1(10390,4280) 10400,4290 Cp9.2@10455,4290 ; Cp9.2@10455,4280 Cp9.2@10455,4290 ; v1(10705,4935) 10705,4868 Cp11.1@10640,4803 10667,4803 UART3.4@10765,4705 10765,4595 10690,4520 Cp10.1@10640,4520 10530,4410 10490,4410 ME3.1@10455,4375 ; C22.1@10015,4085 10055,4045 10160,4045 10170,4035 10170,3853.5 ; 10170,3853.5 SD_CARD.6@10454.38,3853.5 10566.5,3853.5 10720,3700 *1.8@10720,3590 10720,3482.48 S6.2@10482.52,3245 ; Cp9.2@10455,4290 ME3.1@10455,4375
  Bottom Layer w10: v1(10355,4220) 10390,4255 v1(10390,4280) ; v1(10705,4935) 10705,5125 *1.8@10720,5140
GND_BAT: L2.1 MQ1.2 MQ2.2 MQ3.2 MQ4.2 P2.1 | length 6740.4
  Top Layer w10: MQ1.2@8512,5613.91 8545.91,5580 v2(8810,5580) ; MQ4.2@8520,2690 8545,2665 v2(8960,2665) ; v2(9520,2655) 9730,2655 9800,2585 9993.09,2585 MQ3.2@10037,2628.91 ; v2(9520,5575) 9530,5585 9950,5585 MQ2.2@10005,5530
  Top Layer w20: L2.1@9030,5440 v4(9030,5535)
  Bottom Layer w10: v2(8960,2665) 9510,2665 v2(9520,2655) ; 9030,5580 9035,5580 ; P2.1@9092,5653.91 9170.91,5575 v2(9520,5575)
  Bottom Layer w15: v2(9035,5440) 9135,5340 9135,4645 9305,4475 9305,4305 9095,4095 9095,3165 8995,3065 8995,2965 9050,2910 9315,2910 9520,2705 v2(9520,2655)
  Bottom Layer w20: v2(8810,5580) 8880,5580 8915,5545 9030,5545 9030,5580 9092,5642 P2.1@9092,5653.91
  Bottom Layer w30: v4(9030,5535) v4@9030,5545
GND_BATY: L5.1 P7.1 | length 135
  Top Layer w20: L5.1@10425,2055 P7.1@10560,2055
GNDY: C12.2 C13.1 C14.1 C15.1 C16.1 C17.1 C18.1 Cp5.1 Cp6.2 Cp7.2 Cp8.1 L3.1 L5.2 ME2.1 P3.1 P4.2 P5.2 P6.1 R17.2 R18.2 R20.1 R21.1 S1.2 S2.2 S3.2 S4.2 SWD2.2 U6.10 U6.27 U6.49 U6.74 U6.99 U7.11 U7.18 UART2.2 USB2.5 | length 13468.3
  Top Layer w10: C18.1@7425,4345 7425,4305 7450,4280 7640,4280 7653.46,4266.54 U6.99@7653.46,4222.24 7653.46,4165 ; U6.10@7572.76,3984.06 7634.06,3984.06 7644.26,3994.26 ; U6.27@7653.46,3627.76 7653.46,3703.46 7700,3750 7700,3830 ; 7653.46,4141.54 U6.74@8167.24,4141.54 ; 7653.46,4151.54 7653.46,4165 ; 7856.09,4786.09 7856.09,4815 ; 7856.09,4808.91 7856.09,4815 ; U7.18@7856.09,4843.42 7856.09,4815 ; U7.11@7986.02,4792.24 8022.76,4792.24 8085,4730 C14.1@8115,4730 ; U6.49@8086.54,3627.76 8086.54,3671.75 7928.28,3830 7700,3830 ; 7644.26,3994.26 7700,3938.52 7700,3830 ; 7644.26,3994.26 7653.46,4003.46 7653.46,4165
  Top Layer w15: P4.2@6992,1853.91 7292,2153.91 ; L3.1@7260,3640 7110,3640 7072.52,3677.48 S3.2@6990,3677.48 ; C18.1@7415,4350 C16.1@7200,4350 7135,4350 7115,4330 7115,4255 7017.48,4157.48 S2.2@6990,4157.48 ; P4.2@7492,2153.91 7292,2153.91 ; R21.1@7705,3090 R17.2@7600,3090 7292,2782 7292,2680 ; C14.1@8115,4730 8185,4800 8185,4845 C13.1@8115,4915 8075,4955 C12.2@7985,4955 7865,5075 SWD2.2@7865,5150 ; P6.1@8340,1975 8500,1815 8595,1815 ; 8585,1815 8595,1815 ; P3.1@8595,5090 8390,5090 UART2.2@8325,5155 8270,5210 7925,5210 SWD2.2@7865,5150 ; Cp8.1@9565,1905 9395,2075 9310,2075 9300,2065 9300,1960.43 USB2.5@9276.18,1936.61 9276.18,1876.18 9250,1850 9170,1850 9135,1885 8985,1885 8915,1815 R20.1@8790,1815 C17.1@8665,1815 8595,1815 ; S3.2@6990,3677.48 6920,3747.48 6920,4087.48 S2.2@6990,4157.48 ; S3.2@6990,3677.48 6925,3612.48 6925,3257.48 S4.2@6990,3192.48 6990,3050 6920,2980 6920,2775 7015,2680 7292,2680 ; S2.2@6990,4157.48 6925,4222.48 6925,4567.48 S1.2@6990,4632.48 6990,4831.91 P5.2@6992,4833.91 7292,5133.91 P5.2@7492,5133.91 7538.91,5133.91 7615,5210 7805,5210 SWD2.2@7865,5150 ; 7292,2153.91 7292,2680
  Top Layer w20: Cp8.1@9565,1905 9605,1945 Cp6.2@9725,1945 9810,1945 9830,1925 ME2.1@9893,1925 Cp7.2@10025,1925 ; Cp7.2@10055,1955 Cp5.1@10180,1955 10180,2000 10225,2045 L5.2@10325,2045
  Bottom Layer w15: P4.2@7492,2153.91 7493.09,2155 8245,2155 8340,2060 P6.1@8340,1975
IRQ: P1.8 U3.12 | length 217.9
  Top Layer w10: U3.12@9140.47,4168.91 9140.47,4235.47 v2(9145,4240)
  Bottom Layer w10: P1.8@9012,4268.91 9116.09,4268.91 v2(9145,4240)
IRQY: P6.8 U6.24 | length 2720.4
  Top Layer w10: v1(7110,2610) 7110,2395 v1(7245,2260) ; v1(7360,3550) 7518.46,3708.46 U6.24@7572.76,3708.46 ; v1(7365,2075) 7840,2075 P6.8@8040,1875
  Bottom Layer w10: v1(7110,2610) 7110,3300 v1(7360,3550) ; v1(7245,2260) 7245,2195 v1(7365,2075)
KEY1-51: S5.1 u8.20 | length 2148.7
  Top Layer w10: S5.1@9995,3245 10040,3245 v1(10125,3330) ; u8.20@10402.52,4784.02 10445.98,4784.02 v1(10450,4780)
  Bottom Layer w10: v1(10125,3330) 10425,3330 10570,3475 10570,3645 10660,3735 10660,3930 10465,4125 10465,4765 v1(10450,4780)
KEY1Y: S1.1 U6.98 | length 897.7
  Top Layer w10: S1.1@6990,4317.52 7097.48,4425 7445,4425 7470,4400 7470,4305 7475,4300 7645,4300 7672.5,4272.5 7673.15,4273.15 U6.98@7673.15,4222.24
KEY2-51: S6.1 u8.19 | length 1804.3
  Top Layer w10: u8.19@10402.52,4752.52 10512.52,4752.52 v1(10515,4755) ; v1(10700,3345) 10710,3335 S6.1@10710,3245
  Bottom Layer w10: v1(10515,4755) 10535,4775 10595,4775 10700,4670 10700,3670 10670,3640 10670,3569.29 10700,3539.29 v1(10700,3345)